# Altium PCB fat35_finaly.PcbDoc
Units mm, origin at the board's own origin, x right, y up, seen from the top; angles counter-clockwise.
Board outline 354.7 x 156.7 mm, 2 copper layers (Top Layer, Bottom Layer); 78 components, 596 nets, 304 pads, 212 vias.
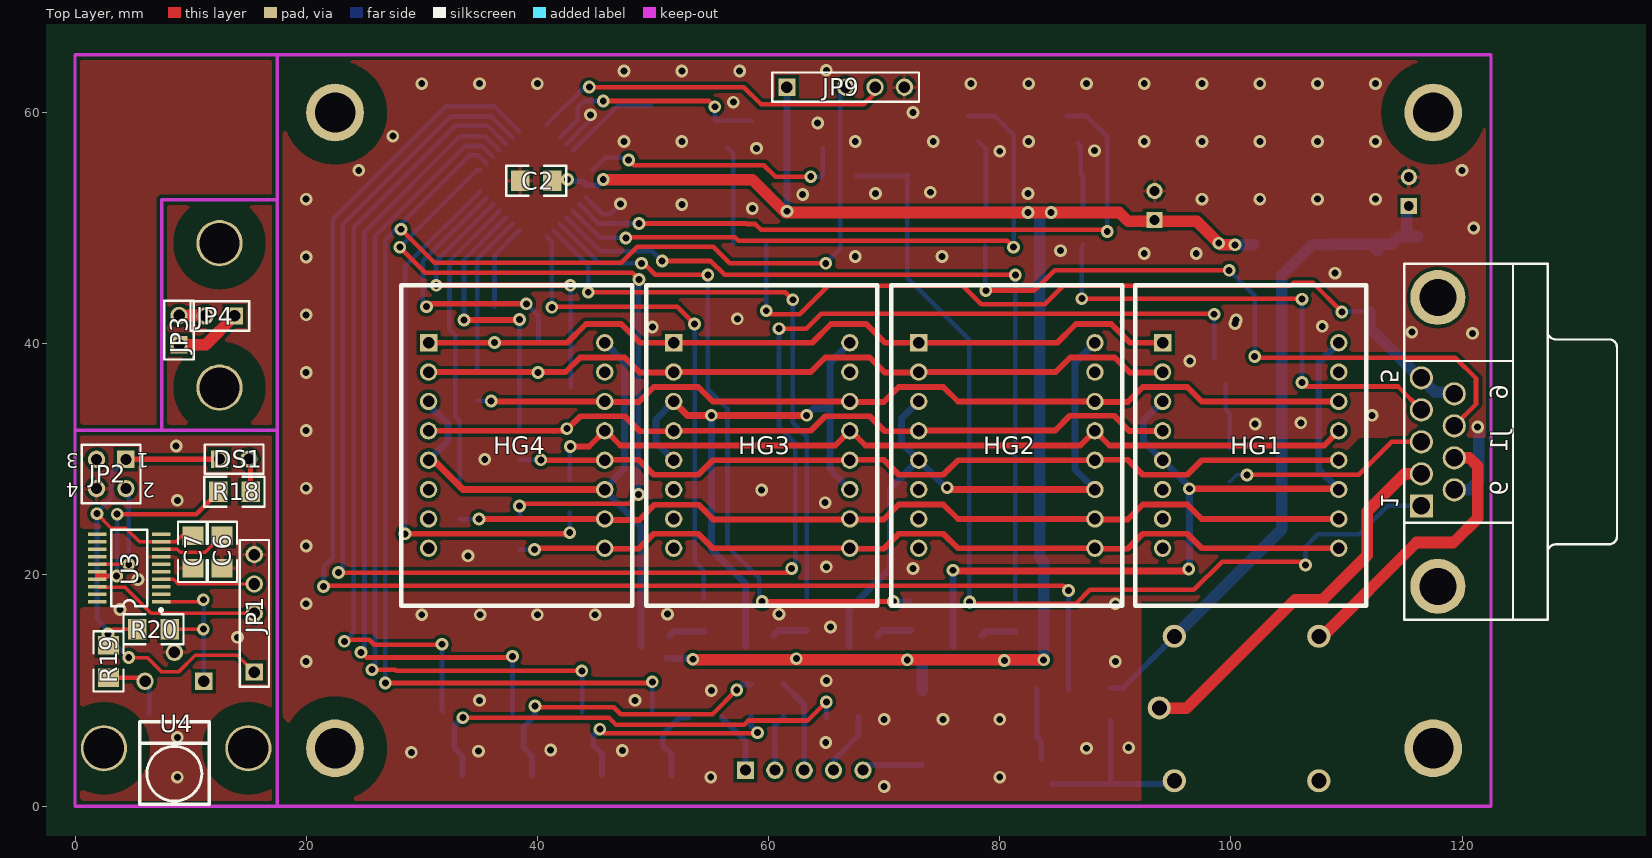
[diagram p0: Top Layer view]
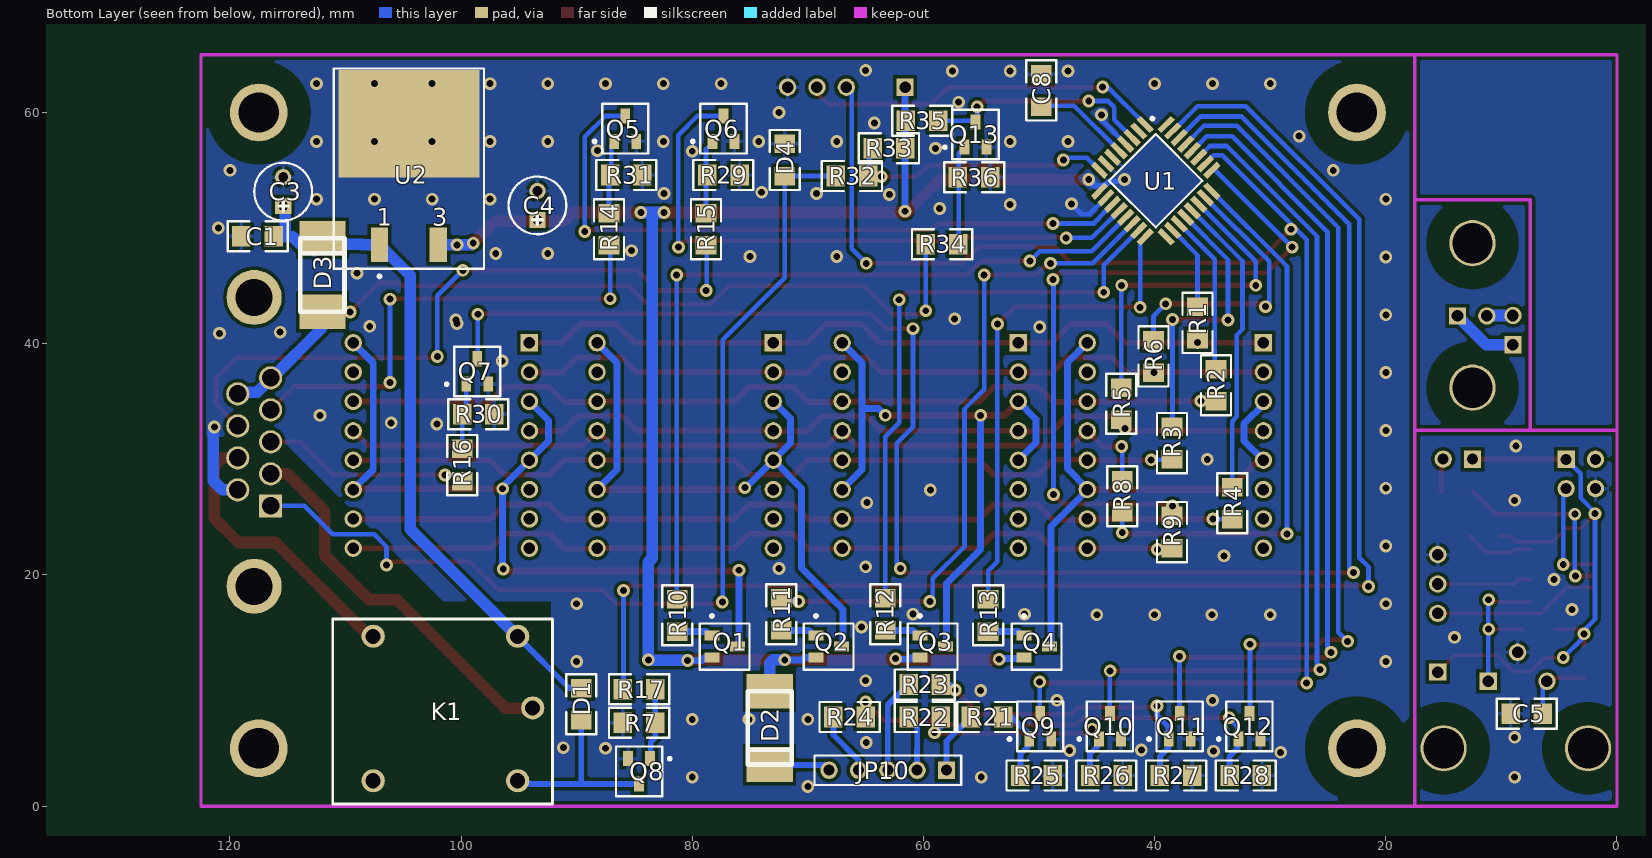
[diagram p1: Bottom Layer view, seen from below]

## Layer stack, top to bottom
Top Layer: signal copper 0.0356
Dielectric: dielectric 0.32, FR-4, Dk 4.8
Bottom Layer: signal copper 0.0356

## Board outline
-93.45,110.7 -93.45,-46 260.55,-46 260.55,106.55 -93.8,106.55 -93.8,-46 -94.15,-46

## Design rules (kind name [scope] priority, off if disabled: settings)
Clearance Clearance_1 [InPoly vs HasPad('Free-0')] p1: gap=2
Clearance Keep_Out [OnLayer('Keep-Out Layer')] p2: gap=0.3
Clearance Poly [InPoly] p3: gap=0.3
Clearance [All] p4: gap=0.2
ComponentClearance [All] p1: gap=0.254 collisioncheckmode=0
HoleSize [All] p1: absolutevalues=TRUE maxlimit=5 minlimit=0.025 maxpercent=80.000 minpercent=20.000
PolygonConnect PolygonConnect_1 [InComponent(U2)] p1: connectstyle=Direct reliefconductorwidth=0.254 reliefentries=4 polygonreliefangle="90 Angle"
PolygonConnect [All] p2: connectstyle=Relief reliefconductorwidth=0.3 reliefentries=4 polygonreliefangle="90 Angle"
RoutingLayers [All] p1: top layer=Horizontal bottom layer=Vertical
RoutingVias [All] p1: holewidth=0.6 width=1.1 viastyle="Through Hole" minholewidth=0.6 minwidth=1.1 maxholewidth=0.7 maxwidth=1.2
SolderMaskExpansion [All] p1: expansion=0.102
TestPointUsage [All] p1: valid=0 allowmultiple=FALSE
Testpoint [All] p1: side=15 testpointundercomponent=TRUE minsize=1.016 maxsize=2.54 preferedsize=1.524 minholesize=0 maxholesize=1.016 preferedholesize=0.813 testpointgrid=0.025 style=1023 order=-539222988
Width [All] p1: maxlimit=2 minlimit=0.2 preferedwidth=0.254 toplayer_prefwidth=1 bottomlayer_prefwidth=1 minimp=50.000000 maximp=50.000000 favimp=50.000000
15 further rules are at their usual default settings.

## Classes and differential pairs
component class FAT35: C1 C2 C3 C4 C8 D1 D2 D3 D4 HG1 HG2 HG3 HG4 J1 JP9 JP10 K1 Q1 Q2 Q3 Q4 Q5 Q6 Q7 Q8 Q9 Q10 Q11 Q12 Q13 R1 R2 R3 R4 R5 R6 R7 R8 R9 R10 R11 R12 R13 R14 R15 R16 R17 R21 R22 R23 R24 R25 R26 R27 R28 R29 R30 R31 R32 R33 R34 R35 R36 U1 U2
component class FAT35o: C5 C6 C7 DS1 DS? JP1 JP2 JP3 JP4 R18 R19 R20 U3 U4

## Components (designator, comment, footprint, x,y, rotation, side; value= is the part's Value field where it differs from the comment)
C1 "1.0" _1206#1 117.6,49.3 r180 bottom
C2 "1.0" _1206#1 39.9,54.1 r0 top
C3 "1000,0x35" el3 115.4,51.9 r90 bottom
C4 "220,0x16" el3 93.4,50.7 r90 bottom
C5 "1.0" _1206#2 7.8,8 r180 bottom (schematic designator C?)
C6 "1.0" _1206#2 12.7,22 r90 top (schematic designator C?)
C7 "1.0" _1206#2 10.2,22 r90 top (schematic designator C?)
C8 "1.0" _1206#2 49.8,61.9 r270 bottom
D1 "L4148" _1206d#1 89.6,8.8 r270 bottom (schematic designator D>)
D2 "10BQ100" D_6_3 73.3,3.6 r90 bottom (schematic designator D?)
D3 "10BQ100" D_6_3 112,49.1 r270 bottom
D4 "BZV55-C5V6" _1206d#2 72,55.9 r90 bottom
DS1 "" HDR1X2#1 12.5,30 r0 top
HG1 "SA08-11EWA" SA08-11 101.7,31.2 r0 top
HG2 "SA08-11EWA" SA08-11 80.6,31.2 r0 top
HG3 "SA08-11EWA" SA08-11 59.4,31.2 r0 top
HG4 "SA08-11EWA" SA08-11 38.2,31.2 r0 top
J1 "D Connector 9" DSUB1.385-2H9 127.4,31.5 r90 top
JP1 "" HDR1X5_uart 15.5,11.6 r90 top (schematic designator JP4)
JP2 "Header 4" HDR2X2 4.4,30 r180 top (schematic designator JP1)
JP3 "Header 2" HDR1X2#2 9,39.9 r90 top
JP4 "Header 2" HDR1X2#2 13.8,42.4 r180 top
JP9 "" HDR1X5_uart 61.6,62.2 r0 top (schematic designator JP?)
JP10 "Header 5" HDR1X5 58,3.1 r0 bottom
K1 "BS115" BS115 95.1,2.2 r90 bottom
Q1 "BC856" SO-G3 77.2,13.8 r270 bottom
Q2 "BC856" SO-G3 68.2,13.8 r270 bottom
Q3 "BC856" SO-G3 59.2,13.8 r270 bottom
Q4 "BC856" SO-G3 50.2,13.8 r270 bottom
Q5 "BC847" SO-G3 85.8,58.601 r180 bottom
Q6 "BC847" SO-G3 77.3,58.6 r180 bottom
Q7 "BC847" SO-G3 98.6,37.6 r180 bottom
Q8 "BC847" SO-G3 84.6,3 r0 bottom
Q9 "BC847" SO-G3 49.9,6.9 r180 bottom (schematic designator Q?)
Q10 "BC847" SO-G3 43.867,6.9 r180 bottom (schematic designator Q?)
Q11 "BC847" SO-G3 37.833,6.9 r180 bottom (schematic designator Q?)
Q12 "BC847" SO-G3 31.8,6.9 r180 bottom (schematic designator Q?)
Q13 "BC847" SO-G3 55.5,58.1 r180 bottom (schematic designator Q?)
R1 "100R" _1206#1 36.3,41.8 r90 bottom
R2 "100R" _1206#1 34.7,36.4 r90 bottom
R3 "100R" _1206#1 38.5,31.4 r90 bottom
R4 "100R" _1206#1 33.3,26.2 r90 bottom
R5 "100R" _1206#1 42.9,34.8 r90 bottom
R6 "100R" _1206#1 40.1,38.9 r90 bottom
R7 "10K" _1206#1 84.6,7.2 r0 bottom
R8 "100R" _1206#1 42.8,26.8 r270 bottom
R9 "100R" _1206#1 38.5,23.7 r90 bottom
R10 "1K0" _1206#1 81.3,16.5 r270 bottom
R11 "1K0" _1206#1 72.3,16.6 r270 bottom
R12 "1K0" _1206#1 63.3,16.6 r270 bottom
R13 "1K0" _1206#1 54.4,16.5 r270 bottom
R14 "1K0" _1206#1 87.2,49.9 r270 bottom
R15 "1K0" _1206#1 78.8,49.9 r270 bottom
R16 "1K0" _1206#1 99.9,29.5 r270 bottom
R17 "1K0" _1206#1 84.6,10.1 r0 bottom
R18 "100R" _1206#2 13.8,27.2 r0 top (schematic designator R?)
R19 "100R" _1206#2 2.9,12.5 r270 top (schematic designator R?)
R20 "3K0" _1206#2 6.8,15.3 r0 top (schematic designator R?)
R21 "1K0" _1206#2 54.5,7.7 r0 bottom (schematic designator R?)
R22 "1K0" _1206#2 59.9,7.7 r0 bottom (schematic designator R?)
R23 "1K0" _1206#2 59.9,10.5 r0 bottom (schematic designator R?)
R24 "1K0" _1206#2 66.4,7.7 r0 bottom (schematic designator R?)
R25 "10K" _1206#2 50.2,2.65 r180 bottom (schematic designator R?)
R26 "10K" _1206#2 44.167,2.65 r180 bottom (schematic designator R?)
R27 "10K" _1206#2 38.133,2.65 r180 bottom (schematic designator R?)
R28 "10K" _1206#2 32.1,2.65 r180 bottom (schematic designator R?)
R29 "10K" _1206#2 77.3,54.6 r180 bottom
R30 "10K" _1206#2 98.5,33.9 r180 bottom
R31 "10K" _1206#2 85.7,54.6 r180 bottom
R32 "100R" _1206#2 66.2,54.5 r0 bottom
R33 "680R" _1206#2 63,56.9 r0 bottom
R34 "1K0" _1206#2 58.4,48.6 r0 bottom (schematic designator R?)
R35 "10K" _1206#2 60.1,59.3 r180 bottom (schematic designator R?)
R36 "10K" _1206#2 55.6,54.4 r180 bottom (schematic designator R?)
U1 "STM8S105K" QFP7X7-G32/X.5N 39.9,54.1 r225 bottom (schematic designator U2)
U2 "7805CD2T" D2PAK 104.5,53.8 r180 bottom (schematic designator U1)
U3 "STM8S103F" TSSO6x6-G20/Y1.6 4.7,20.6 r90 top
U4 "TSOP4836" TSOP4836 8.6,2.8 r90 top (schematic designator U?)

## Footprints (in the part's own frame and the unit in brackets; to place one, negate y for a bottom-side part, rotate by r counter-clockwise, add the part's x,y. Pads: shape width x height; smd on the part's side, far side on the other; paste and mask are expansions set on the pad)
_1206#1 [mm]
  rect 1.6x1.8 smd: 1(-1.399,-0.007) 2(1.401,-0.007)
  silkscreen extent -2.6,-1.31 2.6,1.29
_1206#2 [mm]
  rect 1.6x1.8 smd: 1(-1.412,-0.007) 2(1.388,-0.007)
  silkscreen extent -2.61,-1.31 2.59,1.29
_1206d#1 [mm]
  rect 1.6x1.8 smd: 1(1.397,0.003) 2(-1.403,0.003)
  silkscreen extent -2.6,-1.3 2.6,1.3
_1206d#2 [mm]
  rect 1.6x1.8 smd: 1(1.395,-0.009) 2(-1.405,-0.009)
  silkscreen extent -2.6,-1.31 2.6,1.29
BS115 [mm]
  round 2 hole 1.3: 1(6.29,-1.298) 2(-0.01,12.502) 3(12.49,12.502) 4(-0.01,0.002) 5(12.49,0.002)
  silkscreen extent -2.01,-3 13.99,16
D2PAK [mm]
  rect 1.5x3 smd: 1(-2.557,-5.251) 3(2.523,-5.251)
  rect 12.2x9.3 smd: 4(-0.017,5.249)
  silkscreen extent -6.52,-8.1 6.48,10
D_6_3 [mm]
  rect 3x4 smd: 1(6.341,0.006) 2(-0.009,0.006)
  silkscreen extent -0.01,-1.9 6.34,1.91
DSUB1.385-2H9 [mm]
  rect 2x2 hole 1.5: 1(-5.534,10.92)
  round 2 hole 1.5: 2(-2.764,10.92) 3(0.006,10.92) 4(2.776,10.92) 5(5.546,10.92) 6(-4.149,8.08) 7(-1.379,8.08) 8(1.391,8.08) 9(4.161,8.08)
  round 4.76 hole 3.2: 10(-12.489,9.5) 11(12.501,9.5)
  silkscreen extent -15.39,-6 15.41,12.4
el3 [mm]
  rect 1.4x1.4 hole 0.85: 1(0.011,-0.008)
  round 1.4 hole 0.85: 2(2.511,-0.008)
  silkscreen extent -1.24,-2.5 3.76,2.49
HDR1X2#1 [mm]
  rect 1.5x1.5 hole 0.95: 1(-0.005,0.012)
  round 1.5 hole 0.95: 2(2.535,0.012)
  silkscreen extent -1.28,-1.26 3.8,1.28
HDR1X2#2 [mm]
  rect 1.5x1.5 hole 1: 1(0,0)
  round 1.5 hole 1: 2(2.54,0)
  silkscreen extent -1.27,-1.27 3.81,1.27
HDR1X5 [mm]
  rect 1.5x1.5 hole 0.95: 1(0,0)
  round 1.5 hole 0.95: 2(2.54,0) 3(5.08,0) 4(7.62,0) 5(10.16,0)
  silkscreen extent -1.27,-1.27 11.43,1.27
HDR1X5_uart [mm]
  rect 1.5x1.5 hole 1: 1(-0.008,-0.009)
  round 1.5 hole 1: 3(5.072,-0.009) 4(7.612,-0.009) 5(10.152,-0.009)
  silkscreen extent -1.28,-1.28 11.42,1.26
HDR2X2 [mm]
  rect 1.5x1.5 hole 0.95: 1(0,0)
  round 1.5 hole 0.95: 2(0,2.54) 3(2.54,0) 4(2.54,2.54)
  silkscreen extent -1.27,-1.27 3.81,3.81
QFP7X7-G32/X.5N [mm]
  rect 1.65x0.5 smd: 1(-4.082,2.794) 2(-4.082,1.994) 3(-4.082,1.194) 4(-4.082,0.394) 5(-4.082,-0.406) 6(-4.082,-1.206) 7(-4.082,-2.006) 8(-4.082,-2.806) 17(4.068,-2.806) 18(4.068,-2.006) 19(4.068,-1.206) 20(4.068,-0.406) 21(4.068,0.394) 22(4.068,1.194) 23(4.068,1.994) 24(4.068,2.794)
  rect 0.5x1.65 smd: 9(-2.807,-4.081) 10(-2.007,-4.081) 11(-1.207,-4.081) 12(-0.407,-4.081) 13(0.393,-4.081) 14(1.193,-4.081) 15(1.993,-4.081) 16(2.793,-4.081) 25(2.793,4.069) 26(1.993,4.069) 27(1.193,4.069) 28(0.393,4.069) 29(-0.407,4.069) 30(-1.207,4.069) 31(-2.007,4.069) 32(-2.807,4.069)
  silkscreen extent -4.13,-2.86 2.84,3.72
SA08-11 [mm]
  rect 1.5x1.5 hole 1: 1(-7.609,8.882)
  round 1.5 hole 1: 2(-7.609,6.342) 3(-7.609,3.802) 4(-7.609,1.262) 5(-7.609,-1.278) 6(-7.609,-3.818) 7(-7.609,-6.358) 8(-7.609,-8.898) 9(7.631,-8.898) 10(7.631,-6.358) 11(7.631,-3.818) 12(7.631,-1.278) 13(7.631,1.262) 14(7.631,3.802) 15(7.631,6.342) 16(7.631,8.882)
  silkscreen extent -9.99,-13.86 10.01,13.84
SO-G3 [mm]
  rect 0.85x1.3 smd: 1(-0.948,-1.102) 2(0.952,-1.102) 3(0.002,1.098)
  silkscreen extent -2.77,-2.15 2,2.15
TSOP4836 [mm]
  rect 1.5x1.5 hole 1: 1(8,-2.54)
  round 1.5 hole 1: 2(10.5,0) 3(8,2.54)
  silkscreen extent -2.65,-3 4.5,3
TSSO6x6-G20/Y1.6 [mm]
  rect 0.3x1.6 smd: 1(-2.934,-2.743) 2(-2.284,-2.743) 3(-1.634,-2.743) 4(-0.984,-2.743) 5(-0.334,-2.743) 6(0.316,-2.743) 7(0.966,-2.743) 8(1.616,-2.743) 9(2.266,-2.743) 10(2.916,-2.743) 11(2.916,2.757) 12(2.266,2.757) 13(1.616,2.757) 14(0.966,2.757) 15(0.316,2.757) 16(-0.334,2.757) 17(-0.984,2.757) 18(-1.634,2.757) 19(-2.284,2.757) 20(-2.934,2.757)
  silkscreen extent -3.76,-2.87 3.29,1.56

## Part data
C1 C2 C4 C5 C6 C7 C8: library part "Cap Semi", "Capacitor (Semiconductor SIM Model)"
C3: library part "Cap Pol1", "Polarized Capacitor (Radial)"
D1 D2 D3: library part Diode, "Default Diode"
D4: library part "D Zener", "Zener Diode"
DS1: library part LED0, "Typical INFRARED GaAs LED"
J1: "Receptacle Assembly, 9 Position, Right Angle"
JP1 JP9: library part SWIM_CONN
JP2: "Header, 4-Pin"
JP3 JP4: "Header, 2-Pin"
JP10: "Header, 5-Pin"
K1: "Single-Pole Dual-Throw Relay"
Q1 Q2 Q3 Q4: library part GT109
Q5 Q6 Q7 Q8 Q9 Q10 Q11 Q12 Q13: library part BC847ALT1, "General Purpose Transistor NPN Silicon"
R1 R2 R3 R4 R5 R6 R7 R8 R9 R10 R11 R12 R13 R14 R15 R16 R17 R18 R19 R20 R21 R22 R23 R24 R25 R26 R27 R28 R29 R30 R31 R32 R33 R34 R35 R36: library part Res2, "Resistor"
U2: library part MC78M05CDT, "Three-Terminal Medium Current Positive Voltage Regulator"

## Free pads (board coordinates)
  round 4 hole 3.5: 0(2.5,5) 0(12.5,36.2) 0(12.5,48.7) 0(15,5)
  round 5 hole 3.5: 0(22.5,5) 0(22.5,60) 0(117.5,5) 0(117.5,60)

## Via types
v1: diameter 1.1, hole 0.6, Top Layer to Bottom Layer, 212 vias

## Nets (pads, with @x,y where several pads share a name; then routed paths per layer and width w, separated by ;. In a path a pad name is that pad's centre, name@x,y a point inside that pad or via, vN(x,y) a via of type N, cw(c..) or ccw(c..) an arc to the next point about the centre after c; other vN are vias at no path point)
+5V: C2.2 C4.1 D2.1 JP9.1 Q1.2 Q2.2 Q3.2 Q4.2 R33.1 R35.1 U1.6 U1.7 U1.9 U2.3 | length 162.6
  Top Layer w1: v1(45.7,54.2) 58.6,54.2 61.45,51.35 90.35,51.35 91.1,50.6 97.05,50.6 v1(98.95,48.7) 99.1,48.55 v1(100.35,48.55) ; v1@53.4,12.65 v1(83.8,12.65)
  Bottom Layer w0.5: 43.2,54.05 43.92,54.05 44.27,53.7 45.2,53.7
  Bottom Layer w0.6: 45.2,53.7 v1(45.7,54.2) ; Q4.2@51.2,12.8 51.25,12.75 v1@53.4,12.75 ; Q3.2 61.052,12.848 61.2,12.7 62.4,12.7 v1(62.4,12.75) ; JP9.1 v1(61.592,51.458) ; Q2.2@69.45,12.85 70.3,12.85 70.5,12.65 v1(72,12.65) ; D2.1@73.25,10 D2.1@73.25,11.4 ; Q1.2 78.902,12.848 79.15,12.6 v1(80.4,12.6) ; v1(61.592,51.458) 61.6,51.45 v1(61.592,51.458)
  Bottom Layer w1: v1(72,12.65) 73,12.65 73.3,12.35 D2.1@73.3,10 ; v1@80.35,12.6 83.75,12.6 v1@83.85,12.7 ; v1(82.45,51.35) v1(84.45,51.35) ; 83.45,51 83.45,21.45 83.8,21.1 v1(83.8,12.65) ; v1(98.95,48.7) 99.096,48.554 U2.3@101.971,48.554
  other v1: 53.45,12.7 42.6,54.2
BAT: 
C0: 
CAN: 
CS0: 
CS1: 
D4: 
D7: 
D7: 
DT1: 
DT1: 
DT2: 
DT3: 
DT4: 
DT5: 
GND: C1.1 C2.1 C3.2 C4.2 C8.1 D4.1 J1.6 JP9.5 Q5.2 Q6.2 Q7.2 Q8.2 Q9.2 Q10.2 Q11.2 Q12.2 Q13.2 R7.2 R25.2 R26.2 R27.2 R28.2 R29.2 R30.2 R31.2 R36.2 U1.4 U1.10 U2.4 | length 14.4
  Bottom Layer w0.4: U1.4 44.6,59.357 v1(44.6,59.8) ; U1.10 45.639,51.2 46.3,51.2 v1(47.2,52.1)
  Bottom Layer w1: J1.6 120.651,27.351 121.45,28.15 v1@121.45,32.7
  other v1: 70,1.7 55,2.5 80,2.5 29.1,4.65 34.9,4.75 47.35,4.8 41.15,4.85 87.5,5 91.15,5.05 64.95,5.5 70,7.5 75.1,7.5 80,7.5 35,9.15 48.45,9.15 55.05,10 55.05,10 65,10.85 20,12.5 90,12.5 65.35,15.5 30,16.55 35.05,16.55 40,16.55 45,16.55 51.25,16.6 60.9,16.6 20,17.5 90,17.5 72.5,20.55 65,20.7 34,21.65 20,22.5 64.9,26.25 59.4,27.35 20,27.5 35.45,30 20,32.5 121.35,32.8 102.099,33.05 106.05,33.15 112.2,33.8 20,37.5 96.45,38.5 120.9,40.9 115.65,41 49.95,41.45 107.899,41.5 100.35,41.75 100.45,42.05 57.3,42.15 20,42.5 108.999,46.1 20,47.5 67.5,47.55 75,47.55 92.5,47.8 97,47.8 85.25,48.05 120.999,50 58.6,51.7 52.5,52.05 20,52.5 97.5,52.5 102.5,52.5 107.499,52.5 112.499,52.5 62.95,52.9 69.25,53 82.45,53 74,53.1 24.55,55 120,55 80,56.65 88.2,56.7 58.95,56.9 47.5,57.5 52.5,57.5 67.5,57.5 74.25,57.5 82.5,57.5 92.5,57.5 97.5,57.5 102.5,57.5 107.499,57.5 112.5,57.5 27.5,57.95 64.25,59.1 72.5,60 56.95,60.9 30,62.5 35,62.5 40,62.5 77.5,62.5 82.5,62.5 87.5,62.5 92.5,62.5 97.5,62.5 102.5,62.5 107.499,62.5 112.5,62.5 47.5,63.6 52.5,63.6 57.5,63.6 65,63.65
I1: 
MISO: 
MOSI: 
NetA1_1: 
NetA1_1: 
NetA1_2: 
NetA1_2: 
NetA1_2: 
NetA1_2: 
NetA1_2: 
NetA1_2: 
NetA1_2: 
NetBT1_1: 
NetBT2_1: 
NetBT2_2: 
NetC1_2: C1.2 C3.1 D1.2 D3.2 K1.5 U2.1 | length 62.4
  Bottom Layer w0.5: D1.2 90.653,10.203 95.064,14.614 K1.5@95.1,14.65
  Bottom Layer w1: K1.5@95.064,14.614 104.4,23.95 104.4,45.903 107.051,48.554 108.6,48.554 ; 108.55,48.6 112.15,48.6 112.7,48.05 D3.2@112.7,48.25 ; 109.25,48.6 113.9,48.6 114.55,49.25 C1.2@116.15,49.25 ; 115.2,49.25 115.2,51.7 C3.1@115.5,52
NetC2_2: 
NetC3_1: 
NetC4_1: 
NetC5_1: C5.1 C6.1 C7.1 JP1.5 JP2.4 U3.7 U4.2
  other v1: 8.85,2.5 8.85,5.95 14.05,14.6 3.9,17 5.45,19.6 8.85,26.45 8.75,31.15
NetC5_2: 
NetC5_2: 
NetC5_2: C5.2 R19.2 U4.3 | length 6.3
  Top Layer w0.4: R19.2 5.748,11.112 U4.3
  Bottom Layer w0.4: U4.3 6.412,10.448 C5.2 C5.2@6.407,7.993
NetC6_1: 
NetC6_2: C6.2 U3.8 | length 6
  Top Layer w0.3: U3.8 8.834,22.216 9.1,21.95 11.269,21.95 C6.2
NetC7_1: 
NetC7_2: C7.2 DS1.1 JP1.1 JP2.1 R19.1 R20.1 U3.9 | length 53.3
  Top Layer w0.3: v1(1.9,25.3) 3.15,24.05 4.4,24.05 5.584,22.866 8.716,22.866 9.25,23.4 10.194,23.4 C7.2 ; v1(2.85,14.9) 3.243,15.293 R20.1 ; v1(4.65,12.85) 6.25,12.85 7.5,11.6 8.95,11.6 10.4,13.05 14.052,13.05 JP1.1
  Top Layer w0.4: v1(2.85,14.9) 2.85,13.95 R19.1@2.888,13.912
  Top Layer w0.5: JP2.1 DS1.1@12.5,30
  Bottom Layer w0.4: JP2.1 3.15,28.75 3.15,26.65 1.9,25.4 1.9,16.15 2.85,15.2 2.85,14.65 v1(4.65,12.85)
NetC8_1: 
NetC8_2: C8.2 U1.5 | length 8.3
  Bottom Layer w0.4: U1.5 46.974,60.6 C8.2@49.8,60.6
NetC11_2: 
NetC12_1: 
NetC12_2: 
NetC13_1: 
NetC14_1: 
NetC14_2: 
NetC21_2: 
NetC22_1: 
NetC22_2: 
NetC23_1: 
NetC30_2: 
NetC30_2: 
NetC31_2: 
NetC36_1: 
NetC45_1: 
NetC45_2: 
NetC46_1: 
NetC46_2: 
NetC47_2: 
NetC48_1: 
NetC48_2: 
NetC49_1: 
NetC50_2: 
NetC51_2: 
NetC52_2: 
NetC53_2: 
NetC61_1: 
NetC61_2: 
NetC62_2: 
NetC63_2: 
NetC66_1: 
NetC500_2: 
NetC502_1: 
NetC502_2: 
NetC505_1: 
NetC505_2: 
NetC508_1: 
NetC510_1: 
NetC511_1: 
NetC511_2: 
NetC512_2: 
NetC512_2: 
NetC512_2: 
NetC513_2: 
NetC514_1: 
NetC516_1: 
NetC516_2: 
NetC517_1: 
NetC517_1: 
NetC517_1: 
NetC600_1: 
NetC600_2: 
NetC?_2: 
NetD1_1: 
NetD1_1: D1.1 K1.4 Q8.3 | length 16.2
  Bottom Layer w0.5: Q8.3 94.602,1.902 K1.4@95.05,2.35 ; 89.55,1.902 89.597,1.949 D1.1
NetD2_1: 
NetD2_2: D2.2 JP10.5 | length 5.4
  Bottom Layer w0.5: JP10.5@68.15,3.05 68.65,3.55 73.25,3.55 D2.2@73.291,3.591
NetD2_4: 
NetD2_5: 
NetD3_1: D3.1 J1.5 J1.9 R34.2 | length 72.8
  Top Layer w0.4: v1(59.8,42.85) 60.1,42.55 62.7,42.55 65.15,45 76.8,45 78.4,43.4 83.9,43.4 84.95,44.45 85.5,45 105.15,45 105.4,45.25 107.1,45.25 v1(109.6,42.75)
  Bottom Layer w0.4: R34.2 59.788,42.812 59.8,42.8 v1(59.8,42.85) ; v1(109.6,42.75) 109.65,42.8 D3.1@111.9,42.8
  Bottom Layer w1: D3.1 111.994,41.406 116.3,37.1 116.35,37.1 117.65,35.8 J1.9@119.5,35.8
NetD3_2: 
NetD4_2: D4.2 J1.1 R32.2 | length 88.4
  Top Layer w0.4: v1(77.4,17.65) 77.55,17.5 86.6,17.5 87.8,18.7 96.8,18.7 99.25,21.15 v1@106.35,21.15 ; 105.4,21.15 106.15,21.15 v1(106.45,20.85)
  Bottom Layer w0.4: R32.2 D4.2@72.007,54.507 ; D4.2@72.1,54.6 D4.2@72.007,54.507 ; v1(77.4,17.65) 77.35,17.7 77.35,40.35 72.007,45.693 D4.2@72.007,54.507 ; v1(106.45,20.85) 106.45,22.45 107.5,23.5 111.1,23.5 113.566,25.966 J1.1
NetD5_1: 
NetD5_1: 
NetD5_1: 
NetD6_2: 
NetD6_2: 
NetD6_2: 
NetD6_2: 
NetD20_2: 
NetD500_1: 
NetD500_2: 
NetD501_1: 
NetD503_1: 
NetD505_1: 
NetD505_1: 
NetD505_2: 
NetD506_1: 
NetD506_1: 
NetDS1_2: DS1.2 R18.2 | length 2.9
  Top Layer w0.4: DS1.2 15.188,29.859 R18.2
NetFU500_1: 
NetHG1_3: HG1.3 HG1.5 HG1.11 HG1.16 Q1.3 | length 70.9
  Top Layer w0.6: v1(75.95,20.4) 76,20.35 96.2,20.35 v1(96.35,20.5) ; v1(96.4,27.45) 109.25,27.45 HG1.11@109.3,27.5
  Bottom Layer w0.6: Q1.3@75.95,13.85 v1(75.95,20.4) ; HG1.3 92.45,33.361 92.45,31.563 96.4,27.613 96.4,20.55 v1(96.35,20.5) ; HG1.11 107.6,29.113 107.6,38.351 HG1.16
NetHG2_3: HG2.3 HG2.5 HG2.11 HG2.16 Q2.3 | length 55.5
  Top Layer w0.4: v1@75.4,27.55 v1(75.45,27.55)
  Top Layer w0.6: v1@75.4,27.55 75.568,27.382 HG2.11
  Bottom Layer w0.6: Q2.3@66.947,13.788 66.947,16.997 70.55,20.6 70.55,27.481 HG2.5 ; HG2.3 71.5,33.511 71.5,31.413 75.363,27.55 v1(75.45,27.55) ; HG2.11 86.5,29.113 86.5,38.351 HG2.16
NetHG3_3: HG3.3 HG3.5 HG3.11 HG3.16 Q3.3 | length 56
  Top Layer w0.6: HG3.3 52.993,33.8 v1(63.3,33.8)
  Bottom Layer w0.6: HG3.5 50.25,31.463 50.25,33.461 HG3.3 ; v1(55.05,33.8) 55.05,22.2 58,19.25 Q3.3@58,13.85 ; v1(63.3,33.8) 63.9,34.4 65.3,34.4 ; HG3.11@67,27.351 HG3.11 65.3,29.113 65.3,38.351 HG3.16
NetHG4_3: HG4.3 HG4.5 HG4.11 HG4.16 Q4.3 | length 51.8
  Top Layer w0.5: HG4.5 HG4.5@31.028,29.922
  Top Layer w0.6: HG4.5@31.028,29.922 33.568,27.382 HG4.11
  Bottom Layer w0.6: HG4.5 32.25,31.581 32.25,33.1 30.591,34.759 HG4.3 ; HG4.16 47.55,38.363 47.55,29.2 45.75,27.4 48.947,24.203 Q4.3@48.947,13.788
NetJ1_2: 
NetJ1_2: 
NetJ1_2: J1.2 K1.1 | length 33.4
  Top Layer w1: K1.1@93.75,8.45 96.15,8.45 105.55,17.85 107.95,17.85 111.8,21.7 111.8,25.5 115.036,28.736 J1.2
NetJ1_3: 
NetJ1_3: 
NetJ1_3: J1.3 R16.2 | length 18.1
  Top Layer w0.4: v1(101.4,28.65) 111.05,28.65 113.906,31.506 J1.3
  Bottom Layer w0.3: R16.2@99.85,28.05 99.9,28.05 100.5,28.65 v1(101.4,28.65)
NetJ1_4: 
NetJ1_4: J1.4 R14.2 | length 42.3
  Top Layer w0.4: v1(87.1,43.9) 106.1,43.9 v1(106.15,43.85) ; v1(106.15,36.65) 106.5,36.3 114.457,36.3 J1.4
  Bottom Layer w0.4: v1(87.1,43.9) 87.1,48.45 R14.2@87.2,48.55 ; v1(106.15,36.65) v1(106.15,43.85)
NetJ1_7: 
NetJ1_7: J1.7 K1.3 | length 24.9
  Top Layer w1: K1.3 107.94,14.69 116.05,22.8 119.25,22.8 121.35,24.9 121.35,29.4 120.6,30.15 119.35,30.15 J1.7 J1.7@119.3,30.1
NetJ1_8: J1.8 R15.2 | length 60.8
  Top Layer w0.4: v1(78.8,44.6) 83,44.6 83.5,45.1 ; 83.15,44.75 84.75,46.35 v1(99.85,46.35) ; v1(102.05,38.9) 102.15,38.8 119.4,38.8 121.2,37 121.2,34.771 J1.8
  Bottom Layer w0.4: R15.2@78.75,48.45 78.75,44.65 v1(78.8,44.6) ; v1(99.85,46.35) 102.05,44.15 102.05,42.3 ; v1(102.05,38.9) 102.05,43.8
NetJ2_1: 
NetJ4_1: 
NetJ4_2: 
NetJ600_1: 
NetJP1_1: 
NetJP1_1: 
NetJP1_3: 
NetJP1_3: JP1.3 U3.18 | length 14.5
  Top Layer w0.3: U3.18@2,18.95 4.3,18.95 6.578,16.672 JP1.3
NetJP1_4: JP1.4 U3.4 | length 8.2
  Top Layer w0.3: U3.4 8.534,19.616 8.938,19.212 JP1.4
NetJP1_7: 
NetJP1_10: 
NetJP2_2: 
NetJP2_2: JP2.2 U3.15 | length 9.4
  Top Layer w0.3: U3.15 4.634,20.916 v1(4.65,20.9)
  Bottom Layer w0.4: JP2.2 4.65,27.21 v1(4.65,20.9)
NetJP2_3: 
NetJP3_1: JP3.1 JP4.1 | length 11.7
  Top Layer w1: JP3.1 11.3,39.9 JP4.1
  Bottom Layer w1: JP3.1 11.3,39.9 JP4.1@13.85,42.45
NetJP3_2: 
NetJP3_2: JP3.2 JP4.2 | length 4.5
  Top Layer w1: JP3.2 11.24,42.44 JP4.2@11.25,42.45
  Bottom Layer w1: JP3.2 11.22,42.44 JP4.2
NetJP3_3: 
NetJP3_3: 
NetJP3_3: 
NetJP3_4: 
NetJP3_5: 
NetJP3_5: 
NetJP3_7: 
NetJP3_9: 
NetJP4_1: 
NetJP4_2: 
NetJP4_8: 
NetJP4_9: 
NetJP4_10: 
NetJP5_2: 
NetJP5_5: 
NetJP5_6: 
NetJP5_7: 
NetJP5_9: 
NetJP5_10: 
NetJP5_11: 
NetJP5_12: 
NetJP5_13: 
NetJP5_14: 
NetJP5_15: 
NetJP5_16: 
NetJP5_17: 
NetJP5_18: 
NetJP5_19: 
NetJP5_20: 
NetJP6_2: 
NetJP6_17: 
NetJP7_2: 
NetJP7_2: 
NetJP7_2: 
NetJP7_5: 
NetJP8_3: 
NetJP8_4: 
NetJP8_5: 
NetJP8_6: 
NetJP10_1: JP10.1 R21.2 | length 5.4
  Bottom Layer w0.5: R21.2@55.95,7.65 58,5.6 JP10.1@58,3.05
NetJP10_2: JP10.2 R22.2 | length 4.9
  Bottom Layer w0.5: JP10.2@60.55,3.1 60.54,6.959 R22.2
NetJP10_3: JP10.3 R23.2 | length 8.2
  Bottom Layer w0.5: R23.2@61.3,10.55 63.08,8.77 JP10.3
NetJP10_4: JP10.4 R24.2 | length 5.5
  Bottom Layer w0.5: JP10.4 65.62,3.97 67.788,6.138 R24.2
NetJP100_2: 
NetJP101_1: 
NetJP101_2: 
NetJP101_3: 
NetJP101_4: 
NetJP101_5: 
NetJP101_6: 
NetJP?_1: 
NetJP?_2: 
NetJP?_3: 
NetJP?_4: 
NetQ1_1: 
NetQ1_1: 
NetQ1_1: Q1.1 R10.2 | length 3
  Bottom Layer w0.6: Q1.1@78.447,14.738 78.808,15.099 R10.2
NetQ1_2: 
NetQ1_3: 
NetQ2_1: 
NetQ2_1: Q2.1 R11.2 | length 3.1
  Bottom Layer w0.6: Q2.1@69.447,14.738 69.908,15.199 R11.2
NetQ2_3: 
NetQ2_3: 
NetQ3_1: 
NetQ3_1: 
NetQ3_1: Q3.1 R12.2 | length 3.1
  Bottom Layer w0.6: Q3.1@60.447,14.738 60.908,15.199 R12.2
NetQ3_3: 
NetQ4_1: 
NetQ4_1: Q4.1 R13.2 | length 3.1
  Bottom Layer w0.6: Q4.1@51.447,14.738 51.808,15.099 R13.2
NetQ4_3: 
NetQ5_1: 
NetQ5_1: Q5.1 R14.1 R31.1 | length 6.3
  Bottom Layer w0.4: Q5.1@86.75,57.4 87,57.15 87,54.75 87.207,54.543 R14.1
NetQ6_1: 
NetQ6_1: Q6.1 R15.1 R29.1 | length 6.4
  Bottom Layer w0.4: Q6.1@78.2,57.45 78.807,56.843 R15.1
NetQ7_1: Q7.1 R16.1 R30.1 | length 5.8
  Bottom Layer w0.4: Q7.1 99.548,34.302 99.95,33.9 R30.1@99.957,33.907 ; R30.1 R16.1@99.912,30.962 ; R16.1@99.938,30.962 R16.1@99.912,30.962 ; R16.1@99.912,30.962 99.9,30.95 R16.1@99.912,30.962
NetQ7_2: 
NetQ7_2: 
NetQ7_4: 
NetQ7_4: 
NetQ8_1: Q8.1 R7.1 R17.1 | length 6.2
  Bottom Layer w0.5: R17.1 83.201,5.949 83.6,5.55 Q8.1@83.6,4.1
NetQ8_2: 
NetQ8_4: 
NetQ9_1: Q9.1 R21.1 R25.1 | length 6.2
  Bottom Layer w0.5: Q9.1@50.858,5.639 50.858,6.208 52.3,7.65 R21.1@53.05,7.65 ; Q9.1@50.9,5.2 51.6,4.5 R25.1@51.6,2.6
NetQ9_2: 
NetQ9_4: 
NetQ10_1: 
NetQ10_1: Q10.1 R22.1 R26.1 | length 19.9
  Top Layer w0.4: v1(45.4,6.65) 45.75,6.3 v1@59.05,6.3
  Bottom Layer w0.5: v1(45.4,6.65) 44.825,6.075 44.825,5.639 44.825,5.275 45.6,4.5 R26.1@45.6,2.7 ; R22.1 58.488,6.912 v1(59.05,6.35)
NetQ10_3: 
NetQ10_3: 
NetQ11_1: 
NetQ11_1: Q11.1 R23.1 R27.1 | length 26.8
  Top Layer w0.4: v1(39.8,8.65) 39.9,8.55 46.6,8.55 47.2,7.95 55.15,7.95 v1(57.25,10.05)
  Bottom Layer w0.5: R27.1 39.546,4.304 38.8,5.05 38.8,6.85 39.8,7.85 v1(39.8,8.65) ; v1(57.25,10.05) 57.707,10.507 R23.1
NetQ11_3: 
NetQ12_1: Q12.1 R24.1 R28.1 | length 39.4
  Top Layer w0.4: v1(33.55,7.65) 46.2,7.65 46.8,7.05 57.9,7.05 58.25,7.4 63.4,7.4 v1(65,9)
  Bottom Layer w0.5: R28.1 33.512,4.288 32.8,5 32.8,6.9 v1(33.55,7.65) ; R24.1 64.988,8.988 v1(65,9)
NetQ13_1: Q13.1 R34.1 R36.1 | length 8.5
  Bottom Layer w0.4: Q13.1 56.95,56.496 56.95,54.4 56.95,48.75 R34.1@57,48.7
NetQ500_1: 
NetQ501_1: 
NetQ600_1: 
NetQ600_3: 
NetQ?_1: 
NetQ?_1: 
NetQ?_1: 
NetQ?_1: 
NetQ?_1: 
NetQ?_1: 
NetR1_1: 
NetR3_1: 
NetR3_2: 
NetR3_2: 
NetR3_2: 
NetR4_1: 
NetR4_2: 
NetR5_1: 
NetR6_1: 
NetR7_1: 
NetR7_2: 
NetR8_1: 
NetR8_1: 
NetR8_2: 
NetR8_2: 
NetR13_2: 
NetR14_2: 
NetR15_2: 
NetR16_1: 
NetR16_1: 
NetR16_2: 
NetR17_2: 
NetR18_1: R18.1 U3.16 U3.17 | length 17.3
  Top Layer w0.4: U3.17 1.943,20.207 U3.16@2,20.15 ; 1.943,19.9 v1(3.6,19.9) ; v1(3.65,25.25) 10.5,25.25 R18.1@12.45,27.2
  Bottom Layer w0.4: v1(3.6,19.9) 3.65,19.95 v1(3.65,25.25)
NetR18_2: 
NetR19_2: 
NetR20_2: R20.2 U3.1 U4.1 | length 13.7
  Top Layer w0.3: U3.1 10.916,17.666 v1(11.1,17.85) ; R20.2 11.093,15.293 v1(11.1,15.3)
  Bottom Layer w0.4: v1(11.1,17.85) 11.14,17.81 U4.1
NetR22_2: 
NetR22_2: 
NetR22_2: 
NetR22_2: 
NetR22_2: 
NetR22_2: 
NetR22_2: 
NetR22_2: 
NetR22_2: 
NetR25_1: 
NetR29_1: 
NetR30_2: 
NetR31_2: 
NetR33_2: 
NetR38_1: 
NetR42_1: 
NetR42_2: 
NetR43_1: 
NetR43_2: 
NetR43_2: 
NetR44_1: 
NetR44_2: 
NetR44_2: 
NetR45_2: 
NetR49_1: 
NetR49_2: 
NetR51_1: 
NetR51_2: 
NetR52_1: 
NetR53_1: 
NetR57_1: 
NetR60_1: 
NetR69_2: 
NetR83_2: 
NetR90_2: 
NetR91_1: 
NetR93_1: 
NetR95_1: 
NetR96_2: 
NetR504_1: 
NetR505_2: 
NetR505_2: 
NetR510_1: 
NetR600_1: 
NetR600_2: 
NetR603_1: 
NetR603_2: 
NetR605_2: 
NetR?_1: 
NetS2_1: 
NetU1_1: 
NetU1_2: U1.2
NetU1_5: 
NetU5_1: 
NetU8_3: 
NetU8_7: 
NetU8_8: 
NetU11_5: 
NetU14_3: 
NetU14_4: 
NetU14_5: 
NetU14_6: 
NetU14_12: 
NetU14_13: 
NetU14_14: 
NetU15_3: 
NetU15_3: 
NetU15_3: 
NetU15_3: 
NetU15_4: 
NetU15_5: 
NetU15_5: 
NetU15_5: 
NetU15_5: 
NetU15_5: 
NetU15_5: 
NetU15_7: 
NetU15_7: 
NetU15_9: 
NetU15_10: 
NetU15_15: 
NetU16_3: 
NetU16_4: 
NetU16_6: 
NetU18_1: 
NetU18_2: 
NetU21_1: 
NetU21_2: 
NetU503_4: 
NetU600_3: 
NetX13_1: 
NetX15_1: 
NetX23_1: 
NetX32_1: 
NetX33_1: 
OFF1: 
OFF2: 
P0_0: 
P0_1: 
P0_2: 
P0_3: 
P0_4: 
P0_5: 
P0_6: 
P0_7: 
P0_8: 
P0_8_: 
P0_8_: 
P0_8_: 
P0_9: 
P0_9_: 
P0_9_: 
P0_9_: 
P0_9_: 
P0_10: 
P0_11: 
P0_12: 
P0_13: 
P0_14: 
P0_15: 
P0_16: 
P0_17: 
P0_18: 
P0_19: 
P0_19: 
P0_20: 
P0_21: 
P0_22: 
P0_22: 
P0_22: 
P0_23: 
P0_24: 
P0_25: 
P0_27: 
P0_28: 
P0_29: 
P0_30: 
P1_16: 
P1_17: 
P1_18: 
P1_19: 
P1_20: 
P1_21: 
P1_21: 
P1_22: 
P1_23: 
P1_24: 
P1_25: 
P1_26: 
P1_27: 
P1_28: 
P1_29: 
P1_30: 
P1_31: 
PA0: 
PA2: Q13.3 R35.2 U1.3 | length 20.1
  Top Layer w0.4: v1(45.7,61) 54.85,61 55.4,60.45 v1(55.35,60.5)
  Bottom Layer w0.4: U1.3 43.5,59.388 43.5,60.45 44.05,61 v1(45.7,61) ; v1(55.35,60.5) 55.35,59.35 55.4,59.3 R35.2@58.55,59.3
PA2: 
PA2: 
PA4: 
PA5: 
PA6: 
PA7: 
PA9: 
PA10: 
PA13: 
PA14: 
PA15: 
PB0: R13.1 U1.16 | length 43.4
  Top Layer w0.4: v1(41.25,43.15) 41.3,43.2 52.1,43.2 v1(53.6,41.7)
  Bottom Layer w0.4: U1.16 41.25,48.8 v1(41.25,43.15) ; v1(53.6,41.7) 53.6,21.15 54.407,20.343 R13.1
PB1: R12.1 U1.15 | length 50.9
  Top Layer w0.4: v1(44.4,44.45) 61.45,44.45 v1(62.1,43.8)
  Bottom Layer w0.4: U1.15 44.4,46.782 v1(44.4,44.45) ; v1(62.1,43.8) 62.1,33.15 63.307,31.943 R12.1
PB1: 
PB2: R11.1 U1.14 | length 57.6
  Top Layer w0.4: v1(49,46.95) 49.2,46.95 50.2,45.95 v1(54.75,45.95) ; v1(59.45,17.7) v1(70.8,17.7)
  Bottom Layer w0.4: U1.14 45.363,46.95 v1(49,46.95) ; v1(54.75,45.95) 54.75,36.05 56.45,34.35 56.45,22.45 59.2,19.7 59.2,17.95 v1(59.45,17.7) ; v1(70.8,17.7) 70.85,17.75 R11.1@72.2,17.75
PB2: 
PB3: 
PB3: R10.1 U1.13 | length 69.2
  Top Layer w0.4: v1(50.8,47.15) 55,47.15 56.2,45.95 v1(81.35,45.95)
  Bottom Layer w0.4: U1.13 45.445,48 49.95,48 v1(50.8,47.15) ; R10.1@81.35,17.7 v1(81.35,45.95)
PB4: Q6.3 U1.12 | length 53.9
  Top Layer w0.4: v1(47.65,49.15) 47.7,49.2 57.1,49.2 57.2,49.1 57.4,48.9 80.65,48.9 v1(81.2,48.35)
  Bottom Layer w0.4: U1.12 45.076,49.5 ; 44.95,49.65 45.45,49.15 v1(47.65,49.15) ; Q6.3 79.552,59.698 81.2,58.05 v1(81.2,48.35)
PB5: Q5.3 U1.11 | length 59.8
  Top Layer w0.4: v1(48.8,50.4) 58.05,50.4 58.1,50.35 58.85,50.35 59.35,49.85 89.15,49.85 v1(89.3,49.7)
  Bottom Layer w0.4: U1.11@43.65,52.05 45.3,50.4 ; 44.8,50.85 45.25,50.4 v1(48.8,50.4) ; Q5.3 87.501,59.699 89.3,57.9 v1(89.3,49.7)
PB6: 
PB7: 
PB10: 
PB11: 
PB12: 
PB13: 
PB14: 
PB15: 
PC0: 
PC1: R1.2 U1.18 | length 7.5
  Bottom Layer w0.4: R1.2 36.293,47.656 U1.18
PC2: R2.2 U1.19 | length 13.8
  Bottom Layer w0.4: R2.2@34.8,37.8 34.8,47.294 U1.19
PC3: R3.2 U1.20 | length 24.6
  Top Layer w0.5: v1(33.65,42.05) 38.4,42.05 v1(38.45,42.1)
  Bottom Layer w0.4: v1(33.65,42.05) 33.65,47.276 U1.20 ; R3.2@38.45,32.75 v1(38.45,42.1)
PC4: R4.2 U1.21 | length 26.1
  Bottom Layer w0.4: R4.2@33.3,27.55 33.3,33.3 32.9,33.7 32.9,40.75 32.4,41.25 32.4,47.157 U1.21
PC5: R5.2 U1.22 | length 29.5
  Top Layer w0.5: v1(31.25,45.05) v1(42.85,45.05)
  Bottom Layer w0.4: v1(31.25,45.05) 31.25,47.138 U1.22 ; v1(42.85,45.05) 42.893,45.007 R5.2
PC6: R6.2 U1.23 | length 24.2
  Top Layer w0.5: v1(30.4,43.2) 30.65,43.45 v1(39.05,43.45)
  Bottom Layer w0.4: v1(30.4,43.2) 30.1,43.5 30.1,47.12 U1.23 ; v1(39.05,43.45) 40.093,42.407 R6.2
PC7: R8.2 U1.24 | length 48.4
  Top Layer w0.5: v1(28.55,23.55) 42.7,23.55 v1(42.8,23.65)
  Bottom Layer w0.4: v1(28.55,23.55) 28.55,46.701 U1.24 ; v1(42.8,23.65) R8.2@42.8,25.4 ; R8.2@42.801,25.399 R8.2
PC8: 
PC9: 
PC10: 
PC11: 
PD0: R9.2 U1.25 | length 61.8
  Top Layer w0.4: v1(28.1,48.35) 30.3,46.15 48.2,46.15 v1(48.8,45.55) ; v1(38.45,25.95) 38.65,26.15 47.95,26.15 v1(48.75,26.95)
  Bottom Layer w0.4: v1(28.1,48.35) 34.752,55.002 U1.25 ; v1(38.45,25.95) 38.45,25.636 38.493,25.593 R9.2 ; v1(48.75,26.95) 48.75,45.5 v1(48.8,45.55)
PD1: JP9.3 Q9.3 U1.26 | length 131.5
  Top Layer w0.4: v1(26.85,10.65) 49.85,10.65 v1(49.95,10.75) ; v1(28.2,49.9) 31.1,47 47.25,47 48.65,48.4 55.2,48.4 56.65,46.95 v1(64.95,46.95)
  Bottom Layer w0.4: v1(26.85,10.65) 26.85,49 34.15,56.3 34.882,56.3 U1.26 ; v1@27.995,50.145 27.995,50.105 v1(28.2,49.9) ; Q9.3@49.95,8.2 v1(49.95,10.75) ; v1(64.95,46.95) 66.2,48.2 66.2,61.75 JP9.3@66.65,62.2
PD2: Q10.3 U1.27 | length 73.2
  Top Layer w0.4: v1(25.7,11.8) 27.7,11.8 27.8,11.7 v1(43.85,11.7)
  Bottom Layer w0.4: v1(25.7,11.8) 25.95,12.05 25.95,49.3 33.75,57.1 35.213,57.1 U1.27 ; v1(43.85,11.7) 43.875,11.675 Q10.3@43.875,8.139
PD3: Q11.3 U1.28 | length 70.4
  Top Layer w0.4: v1(24.75,13.3) 25.2,12.85 37.75,12.85 v1(37.85,12.95)
  Bottom Layer w0.4: v1(24.75,13.3) 25.05,13.6 25.05,49.7 33.3,57.95 35.495,57.95 U1.28 ; Q11.3@37.85,8.05 v1(37.85,12.95)
PD4: Q12.3 U1.29 | length 68.3
  Top Layer w0.4: v1(23.3,14.25) 23.45,14.4 25.45,14.4 25.9,13.95 31.7,13.95 v1(31.75,14)
  Bottom Layer w0.4: v1(23.3,14.25) 24.1,15.05 24.1,50.05 32.9,58.85 35.726,58.85 U1.29 ; v1(31.75,14) 31.75,8.3 31.85,8.2 Q12.3@31.85,8.1
PD5: Q7.3 U1.30 | length 152.5
  Top Layer w0.4: v1(22.8,20.2) 61.65,20.2 v1(62,20.55) ; v1(60.9,41.3) 63.25,41.3 64.55,42.6 98.5,42.6 v1(98.55,42.55)
  Bottom Layer w0.4: v1(22.8,20.2) 23.15,20.55 23.15,50.35 32.45,59.65 36.057,59.65 U1.30 ; v1(60.9,41.3) 60.9,32.8 62.3,31.4 62.3,20.85 v1(62,20.55) ; Q7.3@98.55,38.7 v1(98.55,42.55)
PD6: R17.2 U1.31 | length 126.4
  Top Layer w0.4: v1(21.5,19) 21.55,19.05 85.55,19.05 v1(85.95,18.65)
  Bottom Layer w0.4: v1(21.5,19) 21.5,20.7 22.3,21.5 22.3,50.75 32.1,60.55 36.289,60.55 U1.31 ; R17.2@85.95,10.05 v1(85.95,18.65)
PE5: U1.17
PE6: 
PE6: 
PE6: 
PE6: 
PE6: 
PE6: 
PE6: 
PE6: 
PE6: 
PE6: 
PE6: 
PE6: 
PE6: 
PE6: 
PE6: 
PE6: 
PE7: 
PF4: R32.1 R33.2 U1.8 | length 23.4
  Top Layer w0.4: v1(47.9,55.9) 48.35,55.45 59.6,55.45 60.6,54.45 v1(63.65,54.45)
  Bottom Layer w0.4: U1.8 45.869,56.1 47.7,56.1 v1(47.9,55.9) ; v1(63.65,54.45) 64.55,54.45 64.7,54.6 R33.2@64.7,56.9
PQ1: 
PQ2: 
PQ3: 
PQ4: 
PQ5: 
PQ6: 
PROG0: 
PROG1: 
PROG1: 
PROG1: 
PWM: 
PWM0: 
PWM1: 
PWM2: 
REL1: 
REL1: 
REL2: 
REL3: 
REL4: 
REL5: 
REL6: 
RES: 
RST: 
RST: JP9.4 U1.1 | length 31.3
  Top Layer w0.4: v1(44.5,62.2) 57.85,62.2 59.35,60.7 68.25,60.7 69.212,61.662 JP9.4
  Bottom Layer w0.4: U1.1 44.049,62.2 v1(44.5,62.2)
RTX: 
RX: 
RXCAN: 
SA: HG1.1 HG2.1 HG3.1 HG4.1 R1.1 | length 67.9
  Top Layer w0.5: HG4.1 42.582,40.082 44.2,41.7 47.25,41.7 48.868,40.082 HG3.1 63.782,40.082 65.4,41.7 68.45,41.7 70.068,40.082 HG2.1 84.982,40.082 86.6,41.7 89.65,41.7 91.268,40.082 HG1.1@94.191,40.082
  Bottom Layer w0.4: R1.1 36.293,40.107 v1(36.3,40.1)
SB: HG1.14 HG2.14 HG3.14 HG4.14 R2.1 | length 77.7
  Top Layer w0.5: v1(36,35.05) 36.048,35.002 HG4.14 ; HG4.14@45.873,34.96 48.772,34.96 50.072,36.26 53.922,36.26 55.18,35.002 HG3.14 ; HG3.14@67.073,34.96 69.972,34.96 71.272,36.26 75.122,36.26 76.38,35.002 HG2.14 ; HG2.14@88.173,34.96 91.072,34.96 92.372,36.26 96.222,36.26 97.48,35.002 HG1.14
  Bottom Layer w0.4: R2.1@34.8,35.05 v1(36,35.05)
SC: HG1.12 HG2.12 HG3.12 HG4.12 R3.1 | length 74
  Top Layer w0.5: v1@40.5,29.95 HG4.12 ; HG4.12@45.873,29.964 48.772,29.964 50.072,28.664 53.922,28.664 55.18,29.922 HG3.12 ; HG3.12@67.073,29.964 69.972,29.964 71.272,28.664 75.122,28.664 76.38,29.922 HG2.12 ; HG2.12@88.173,29.964 91.072,29.964 92.372,28.664 96.222,28.664 97.48,29.922 HG1.12
  Bottom Layer w0.4: R3.1@38.45,29.95 v1@40.5,29.95
  other v1: 40.3,29.95
SCK: 
SD: HG1.10 HG2.10 HG3.10 HG4.10 R4.1 | length 79.3
  Top Layer w0.5: v1@34.75,24.95 34.858,24.842 HG4.10 ; HG4.10@45.915,24.758 48.814,24.758 50.114,26.058 53.964,26.058 55.222,24.8 67.073,24.8 69.972,24.8 71.272,26.1 75.122,26.1 76.38,24.842 HG2.10 ; HG2.10@88.173,24.8 91.072,24.8 92.372,26.1 96.222,26.1 97.48,24.842 HG1.10
  Bottom Layer w0.4: R4.1 34.551,24.801 34.7,24.95 v1@34.75,24.95
  other v1: 34.95,24.842
SE: HG1.4 HG2.4 HG3.4 HG4.4 R5.1 | length 66.7
  Top Layer w0.5: HG4.4 42.442,32.462 43.7,33.72 47.55,33.72 48.85,32.42 HG3.4@51.749,32.42 ; 41.4,32.45 41.4,32.462 ; HG3.4 63.642,32.462 64.9,33.72 68.75,33.72 70.05,32.42 HG2.4@72.949,32.42 ; HG2.4@72.95,32.5 84.801,32.5 86.059,33.758 89.909,33.758 91.209,32.458 HG1.4@94.108,32.458
  other v1: 42.55,32.65
SF: HG1.2 HG2.2 HG3.2 HG4.2 R6.1 | length 66.8
  Top Layer w0.5: HG4.2 42.442,37.542 43.7,38.8 47.55,38.8 48.85,37.5 51.749,37.5 HG3.2 63.642,37.542 64.9,38.8 68.75,38.8 70.05,37.5 HG2.2@72.949,37.5 ; v1(40.05,37.5) v1@40.05,37.55 ; HG2.2 84.842,37.542 86.1,38.8 89.95,38.8 91.25,37.5 HG1.2@94.149,37.5
  Bottom Layer w0.4: v1(40.05,37.5) R6.1
SG: HG1.13 HG2.13 HG3.13 HG4.13 R8.1 | length 72.9
  Top Layer w0.5: v1(42.85,31.1) 44.469,31.1 HG4.13 ; HG4.13@45.931,32.462 47.193,31.2 65.769,31.2 HG3.13 ; HG3.13@67.131,32.462 68.393,31.2 86.969,31.2 HG2.13 89.493,31.2 108.069,31.2 HG1.13
  Bottom Layer w0.4: R8.1 42.807,31.057 v1(42.85,31.1)
SH: HG1.9 HG2.9 HG3.9 HG4.9 R9.1 | length 74.1
  Top Layer w0.5: v1(39.75,22.2) 39.852,22.302 HG4.9 ; HG4.9@45.873,22.26 48.772,22.26 50.072,23.56 53.922,23.56 55.18,22.302 HG3.9 ; HG3.9@67.073,22.26 69.972,22.26 71.272,23.56 75.122,23.56 76.38,22.302 HG2.9 ; HG2.9@88.173,22.26 91.072,22.26 92.372,23.56 96.222,23.56 97.48,22.302 HG1.9
  Bottom Layer w0.4: R9.1@38.45,22.2 v1(39.75,22.2)
SK1: 
SK2: 
SK3: 
SK4: 
SWIM: 
T3: 
T3: 
TD1: 
TX: 
U2: 
U5: 
U6: 
U7: 
U8: 
UAKB: 
UB1: 
UB2: 
UBM1: 
UBM2: 
UIB1: 
UIB2: 
ULOAD: 
US: 
US1: 
US1: 
US1: 
US1: 
US1: 
US1: 
US1: 
US1: 
US1: 
UTX: 
UU1: 
UU2: 
UU3: 
UU4: 
UU5: 
UU6: 
UU7: 
UU8: 
UU9: 
UU10: 
UU11: 
UU12: 
UU13: 
UU14: 
VREF: 
VS: 
VS: 
pads on no net: HG1.6 HG1.7 HG1.8 HG1.15 HG2.6 HG2.7 HG2.8 HG2.15 HG3.6 HG3.7 HG3.8 HG3.15 HG4.6 HG4.7 HG4.8 HG4.15 J1.10 J1.11 JP2.3 K1.2 U1.32 U3.2 U3.3 U3.5 U3.6 U3.10 U3.11 U3.12 U3.13 U3.14 U3.19 U3.20

## Polygon pours and split planes (outlines as drawn)
GND on Top Layer (hatched 90Degree grid 0.1 track 0.3): 0.05,64.95 0.05,32.45 7.5,32.45 7.5,52.45 17.5,52.45 17.5,65 0,65
GND on Top Layer (hatched 90Degree grid 0.1 track 0.3): 7.5,52.5 7.5,32.5 17.55,32.5 17.55,52.45 7.5,52.45
GND on Top Layer (hatched 90Degree grid 0.1 track 0.3, remove dead copper): 17.5,65 17.5,0 92.1,0 92.1,17.85 96.95,17.85 111.1,32 122.55,32 122.55,65
NetC5_1 on Top Layer (hatched 90Degree grid 0.1 track 0.3, remove dead copper): -2.95,-0.9 18.3,-0.9 18.3,32.7 -2.65,32.7 -2.65,-0.95 -2.05,-0.95
GND on Bottom Layer (hatched 90Degree grid 0.1 track 0.3): 0,65 17.5,65 17.5,52.5 7.5,52.5 7.5,32.55 0.05,32.55 0.05,64.95
GND on Bottom Layer (hatched 90Degree grid 0.1 track 0.3): 7.5,52.45 7.5,32.5 17.5,32.5 17.5,52.45
GND on Bottom Layer (hatched 90Degree grid 0.1 track 0.3, remove dead copper): 17.45,64.95 17.45,0 92.05,0 92.05,17.85 101.5,17.85 113.7,30.05 115.1,31.45 115.75,32.1 122.5,32.1 122.5,64.95
+5V on Bottom Layer (hatched 90Degree grid 0.1 track 0.3, remove dead copper): 40,60.8 33.25,54.05 39.75,47.55 46.3,54.1 46.5,54.3
NetC5_1 on Bottom Layer (hatched 90Degree grid 0.1 track 0.3, remove dead copper): -2.55,-0.9 18.3,-0.9 18.3,32.6 -2.5,32.6 -2.5,-0.95

## Keep-outs
Keep-Out Layer:
  lines w0.3: 0,32.5 17.5,32.5 17.5,0 ; 7.5,32.5 7.5,52.45 17.45,52.45 ; 17.5,65 17.5,0 ; 17.5,0 70,0 122.5,0 122.5,65 70,65 0,65 0,0 17.5,0

## Silkscreen, mask and mechanical layers (free items; w line width, h text height)
Mechanical 1:
  lines w0.3: 70,-39 70,75

## Text inside footprints (layer, text, board x,y; h text height)
J1: Top Overlay "6" at 122.425,26.851 h1.5 r270; Top Overlay "9" at 122.425,35.161 h1.5 r270; Top Overlay "5" at 113.025,36.546 h1.5 r270; Top Overlay "1" at 113.025,25.716 h1.5 r270
JP2: Top Overlay "3" at 0.336,30.508 h1.27 r180; Top Overlay "4" at 0.336,27.968 h1.27 r180; Top Overlay "2" at 6.94,27.968 h1.27 r180; Top Overlay "1" at 6.432,30.508 h1.27 r180
U2: Bottom Overlay "3" at 102.485,50.224 h1.5; Bottom Overlay "1" at 107.307,50.224 h1.5